# EAGLE board Micromouse_controller_v007 (EAGLE 7.2.0)
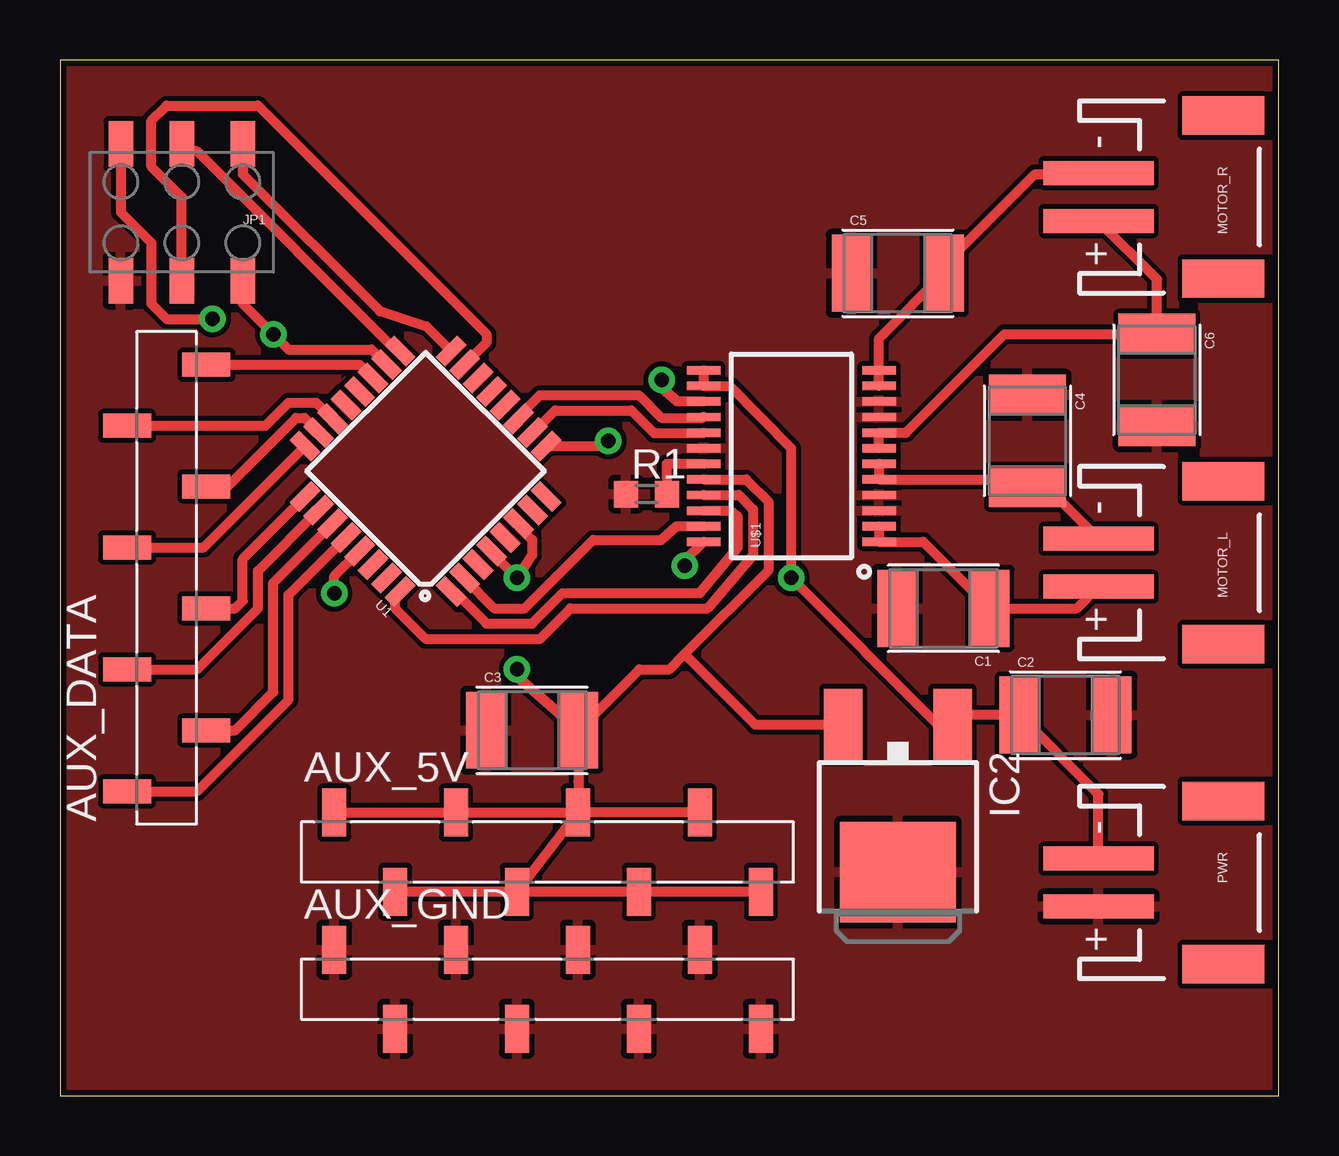
[diagram p0: board, top side]
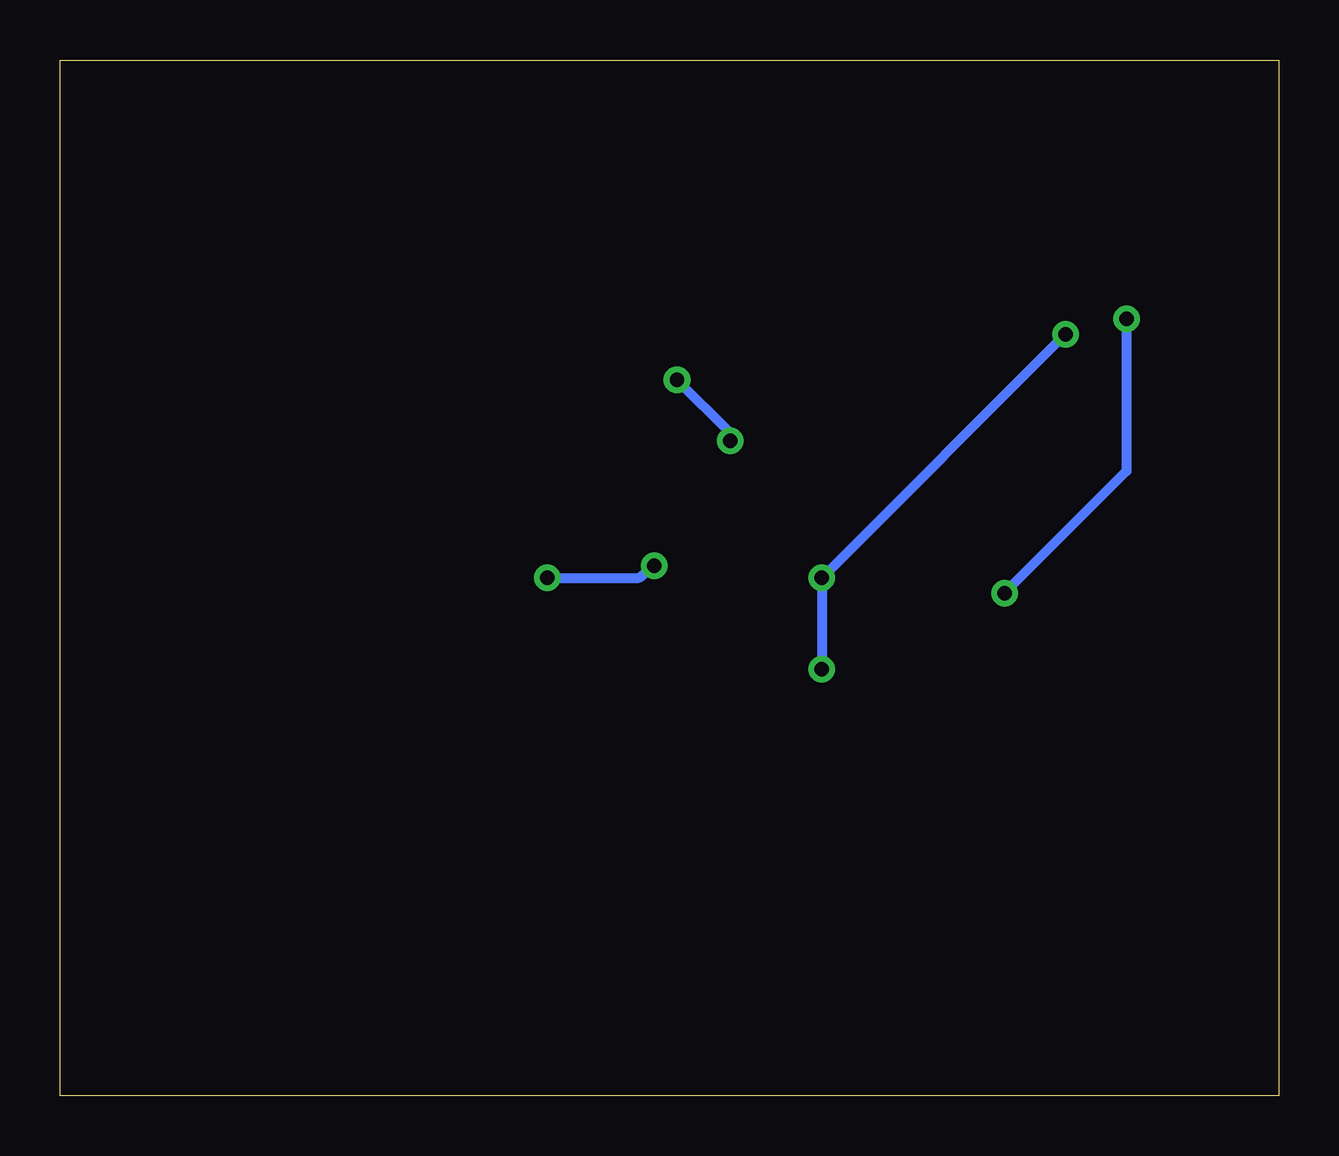
[diagram p1: board, bottom side, seen from below]

Size 50.8 x 43.18 mm. Coordinates in mm from the lower left corner, seen from the top.
Outline: 0,0 50.8,0 50.8,43.18 0,43.18 0,0
Copper layers (1*16): Top 0.035mm / dielectric 1.5mm / Bottom 0.035mm
Design rules "SparkFun": minimum track width 8mil, minimum drill 20mil, track to track 8mil, track to pad 8mil, pad to pad 8mil, via to via 8mil, smd to smd 8mil, copper to edge 10mil, drill to drill 8mil, minimum pad ring 12mil, minimum via ring 10mil, stop-mask expansion 4mil, vias tented up to drill 25mil, thermal gap 10mil

## Footprints (pad centres in the part's own frame; a part is rotated, then mirrored left to right if it is on the bottom)
1X08_SMD_ALT = smd 1 x 2: 1 0,-1.65; 2 -2.54,1.65; 3 -5.08,-1.65; 4 -7.62,1.65; 5 -10.16,-1.65; 6 -12.7,1.65; 7 -15.24,-1.65; 8 -17.78,1.65
GRM43D = smd 1.65 x 3.2: A 1.927,0; C -1.927,0
DPAK = smd 1.6 x 3: 1 -2.28,-4.04; 3 2.28,-4.04 | smd 4.826 x 4.191: 4 0,2.096
2X3_SMD = smd 1.02 x 1.9: 1 -2.54,-2.85; 2 -2.54,2.85; 3 0,-2.85; 4 0,2.85; 5 2.54,-2.85; 6 2.54,2.85
JST-2-SMD = smd 1 x 4.6: 1 -1,-3.7; 2 1,-3.7 | smd 1.6 x 3.4: NC1 -3.4,1.5; NC2 3.4,1.5
R0603 = smd 1 x 1.1: 1 -0.85,0; 2 0.85,0
TQFP32-08 = smd 1.27 x 0.559: 1 -4.293,2.8; 2 -4.293,2; 3 -4.293,1.2; 4 -4.293,0.4; 5 -4.293,-0.4; 6 -4.293,-1.2; 7 -4.293,-2; 8 -4.293,-2.8; 17 4.293,-2.8; 18 4.293,-2; 19 4.293,-1.2; 20 4.293,-0.4; 21 4.293,0.4; 22 4.293,1.2; 23 4.293,2; 24 4.293,2.8 | smd 0.559 x 1.27: 9 -2.8,-4.293; 10 -2,-4.293; 11 -1.2,-4.293; 12 -0.4,-4.293; 13 0.4,-4.293; 14 1.2,-4.293; 15 2,-4.293; 16 2.8,-4.293; 25 2.8,4.293; 26 2,4.293; 27 1.2,4.293; 28 0.4,4.293; 29 -0.4,4.293; 30 -1.2,4.293; 31 -2,4.293; 32 -2.8,4.293
SSOP24 = smd 0.348 x 1.397: 1 -3.575,-3.656; 2 -2.925,-3.656; 3 -2.275,-3.656; 4 -1.625,-3.656; 5 -0.975,-3.656; 6 -0.325,-3.656; 7 0.325,-3.656; 8 0.975,-3.656; 9 1.625,-3.656; 10 2.275,-3.656; 11 2.925,-3.656; 12 3.575,-3.656; 13 3.575,3.656; 14 2.925,3.656; 15 2.275,3.656; 16 1.625,3.656; 17 0.975,3.656; 18 0.325,3.656; 19 -0.325,3.656; 20 -0.975,3.656; 21 -1.625,3.656; 22 -2.275,3.656; 23 -2.925,3.656; 24 -3.575,3.656

## Placement (x,y rotation side)
AUX_5V  [1X08_SMD_ALT]  29.21,10.16 0 top
AUX_DATA  [1X08_SMD_ALT]  4.45,30.48 90 top
AUX_GND  [1X08_SMD_ALT]  29.21,4.45 0 top
C1  [GRM43D]  36.83,20.32 180 top
C2  [GRM43D]  41.91,15.88 0 top
C3  [GRM43D]  19.68,15.24 0 top
C4  [GRM43D]  40.32,27.3 270 top
C5  [GRM43D]  34.92,34.29 0 top
C6  [GRM43D]  45.72,29.84 270 top
IC2  TA4805BF  [DPAK]  34.92,11.43 180 top
JP1  [2X3_SMD]  5.08,36.83 180 top
MOTOR_L  [JST-2-SMD]  46.99,22.23 270 top
MOTOR_R  [JST-2-SMD]  46.99,37.47 270 top
PWR  12v  [JST-2-SMD]  46.99,8.89 270 top
R1  10k  [R0603]  24.45,25.08 0 top
U1  ATMEGA328P_TQFP  [TQFP32-08]  15.24,26.04 135 top
U$1  TB6612FNG  [SSOP24]  30.48,26.67 90 top

## Library data of the parts
AUX_5V AUX_DATA AUX_GND = SparkFun-Connectors; PROD_ID: CONN-10204
C1-C6 = SparkFun-Capacitors
IC2 = MyParts
JP1 = SparkFun-Connectors; PROD_ID: CONN-11290
MOTOR_L MOTOR_R PWR = SparkFun-Connectors; PROD_ID: CONN-11443
R1 = resistor
U1 = SparkFun-DigitalIC; PROD_ID: IC-09069
U$1 = SparkFun-PowerIC; PROD_ID: IC-09363

## Nets
+5V: AUX_5V.1 AUX_5V.2 AUX_5V.3 AUX_5V.4 AUX_5V.5 AUX_5V.6 AUX_5V.7 AUX_5V.8 C3.A IC2.3 JP1.2 U1.4 U1.6 U1.18 U$1.20
+12V: C2.C IC2.1 PWR.1 U$1.13 U$1.14 U$1.24
ADC0: AUX_DATA.3 U1.23
ADC1: AUX_DATA.4 U1.24
ADC2: AUX_DATA.5 U1.25
ADC3: AUX_DATA.6 U1.26
ADC4: AUX_DATA.7 U1.27
ADC5: AUX_DATA.8 U1.28
ADC6: AUX_DATA.1 U1.19
ADC7: AUX_DATA.2 U1.22
AIN1_DRIVER: U1.32 U$1.21
AIN2_DRIVER: U1.1 U$1.22
BIN1_DRIVER: U1.10 U$1.17
BIN2_DRIVER: U1.11 U$1.16
GND: AUX_GND.1 AUX_GND.2 AUX_GND.3 AUX_GND.4 AUX_GND.5 AUX_GND.6 AUX_GND.7 AUX_GND.8 C1.A C2.A C3.C C4.C C5.C C6.A IC2.4 JP1.6 PWR.2 R1.1 U1.3 U1.5 U1.21 U$1.3 U$1.4 U$1.9 U$1.10 U$1.18
N$11: C1.C MOTOR_L.2 U$1.1 U$1.2
N$12: C4.A MOTOR_L.1 U$1.5 U$1.6
N$13: C5.A MOTOR_R.1 U$1.11 U$1.12
N$14: C6.C MOTOR_R.2 U$1.7 U$1.8
N$17: JP1.1 U1.16
N$18: JP1.3 U1.17
N$22: JP1.4 U1.15
PWMA_DRIVER: U1.2 U$1.23
PWMB_DRIVER: U1.9 U$1.15
RST: JP1.5 U1.29
STBY: R1.2 U$1.19

## Tracks (layer width: path | path; a pad name or v marks a point on that pad's centre or on a via)
+5V  (via drill 0.6)
  Top 0.406: U1.4 17.99,22.65 v19.05,21.59 19.68,22.54 19.68,23.18 19.12,23.74 U1.6 | v19.05,17.78 19.05,17.48 C3.A | C3.A 24.15,17.78 25.4,17.78 26.04,18.41 | C3.A 21.61,13.1 AUX_5V.4 | AUX_5V.1 AUX_5V.3 AUX_5V.5 | AUX_5V.5 AUX_5V.7 | AUX_5V.5 AUX_5V.4 | AUX_5V.8 AUX_5V.6 AUX_5V.4 | AUX_5V.2 AUX_5V.4 | JP1.2 7.62,33.02 v8.89,31.75 9.53,31.11 12.99,31.11 U1.18 | U$1.20 28.6,25.7 29.53,24.77 29.53,21.91 26.04,18.41 | IC2.3 28.98,15.47 26.04,18.41
  Bottom 0.406: v19.05,17.78 v19.05,21.59 v8.89,31.75
+12V  (via drill 0.6)
  Top 0.406: U$1.13 U$1.14 26.89,29.57 27.94,29.57 30.48,26.99 v30.48,21.59 36.6,15.47 IC2.1 37.61,15.88 C2.C 43.29,12.57 PWR.1 | v26.04,22.1 26.04,22.31 U$1.24
  Bottom 0.406: v30.48,21.59 26.67,21.59 v26.04,22.1
ADC0
  Top 0.406: AUX_DATA.3 6.99,25.4 9.84,28.26 10.19,28.26 U1.23
ADC1
  Top 0.406: AUX_DATA.4 5.99,22.86 U1.24
ADC2
  Top 0.406: AUX_DATA.5 7.3,20.32 7.62,20.64 7.62,22.38 U1.25
ADC3
  Top 0.406: AUX_DATA.6 5.71,17.78 8.26,20.32 8.26,21.88 U1.26
ADC4
  Top 0.406: AUX_DATA.7 7.3,15.24 8.89,16.83 8.89,21.38 U1.27
ADC5
  Top 0.406: AUX_DATA.8 5.71,12.7 9.53,16.51 9.53,20.89 U1.28
ADC6
  Top 0.406: AUX_DATA.1 12.49,30.48 U1.19
ADC7
  Top 0.406: AUX_DATA.2 8.57,27.94 9.53,28.89 10.69,28.89 U1.22
AIN1_DRIVER
  Top 0.406: U$1.21 28.3,25.05 28.89,24.45 28.89,22.54 26.99,20.32 21.27,20.32 20,19.05 15.24,19.05 13.97,20.32 13.97,20.8 U1.32
AIN2_DRIVER
  Top 0.406: U1.1 16.45,21.02 17.78,19.68 19.68,19.68 20.95,20.95 26.67,20.95 28.26,22.86 28.26,24.13 27.94,24.38 26.84,24.38 U$1.22
BIN1_DRIVER
  Top 0.406: U1.10 19.72,27.66 20.64,28.57 23.81,28.57 24.77,27.62 26.8,27.62 U$1.17
BIN2_DRIVER
  Top 0.406: U1.11 19.01,28.22 20,29.21 24.13,29.21 25.08,28.26 26.79,28.26 U$1.16
GND
  pour Top: -2.54,53.98 54.61,53.98 54.61,-3.81 -2.54,-3.81
N$11
  Top 0.406: U$1.2 U$1.1 35.98,23.09 C1.C 42.38,20.32 MOTOR_L.2
N$12
  Top 0.406: U$1.6 U$1.5 39.69,25.7 C4.A 41.14,25.38 MOTOR_L.1
N$13
  Top 0.406: U$1.11 U$1.12 34.14,31.57 C5.A 36.85,34.63 40.64,38.42 43.24,38.42 MOTOR_R.1
N$14
  Top 0.406: U$1.7 U$1.8 35.27,27.64 39.37,31.75 45.7,31.75 C6.C 45.72,34.03 MOTOR_R.2
N$17
  Top 0.406: JP1.1 7.62,38.42 13.34,32.7 15.28,32.07 U1.16
N$18
  Top 0.406: U1.17 14.04,31.05 5.71,39.37 5.39,39.37 JP1.3
N$22
  Top 0.406: JP1.4 5.08,37.47 3.81,38.73 3.81,40.64 4.45,41.27 8.26,41.27 17.78,31.75 17.78,31.4 U1.15
PWMA_DRIVER
  Top 0.406: U1.2 16.86,21.56 18.1,20.32 19.37,20.32 22.23,23.18 25.08,23.18 25.72,23.75 25.8,23.75 U$1.23
PWMB_DRIVER  (via drill 0.6)
  Top 0.406: U1.9 22.64,27.09 v22.86,27.3 | v25.08,29.84 25.08,29.53 25.72,28.96 U$1.15
  Bottom 0.406: v22.86,27.3 22.86,27.62 v25.08,29.84
RST  (via drill 0.6)
  Top 0.406: JP1.5 2.54,36.83 3.81,35.56 3.81,33.02 4.45,32.38 v6.35,32.38 | v11.43,20.95 11.43,21.66 U1.29
  Bottom 0.406: v6.35,32.38 6.35,26.04 v11.43,20.95
STBY
  Top 0.406: U$1.19 25.29,26.34 R1.2